# Altium PCB SRX.PcbDoc (part 1 of 2)
Units mm, origin at the board's own origin, x right, y up, seen from the top; angles counter-clockwise.
Board outline 75 x 42 mm, 4 copper layers (Outer Top Layer, Inner Top Layer, Inner Bottom Layer, Outer Bottom Layer), stack 1.564 mm thick; 114 components, 89 nets, 403 pads, 367 vias.
Unrouted connection lines stored in the file: 107.
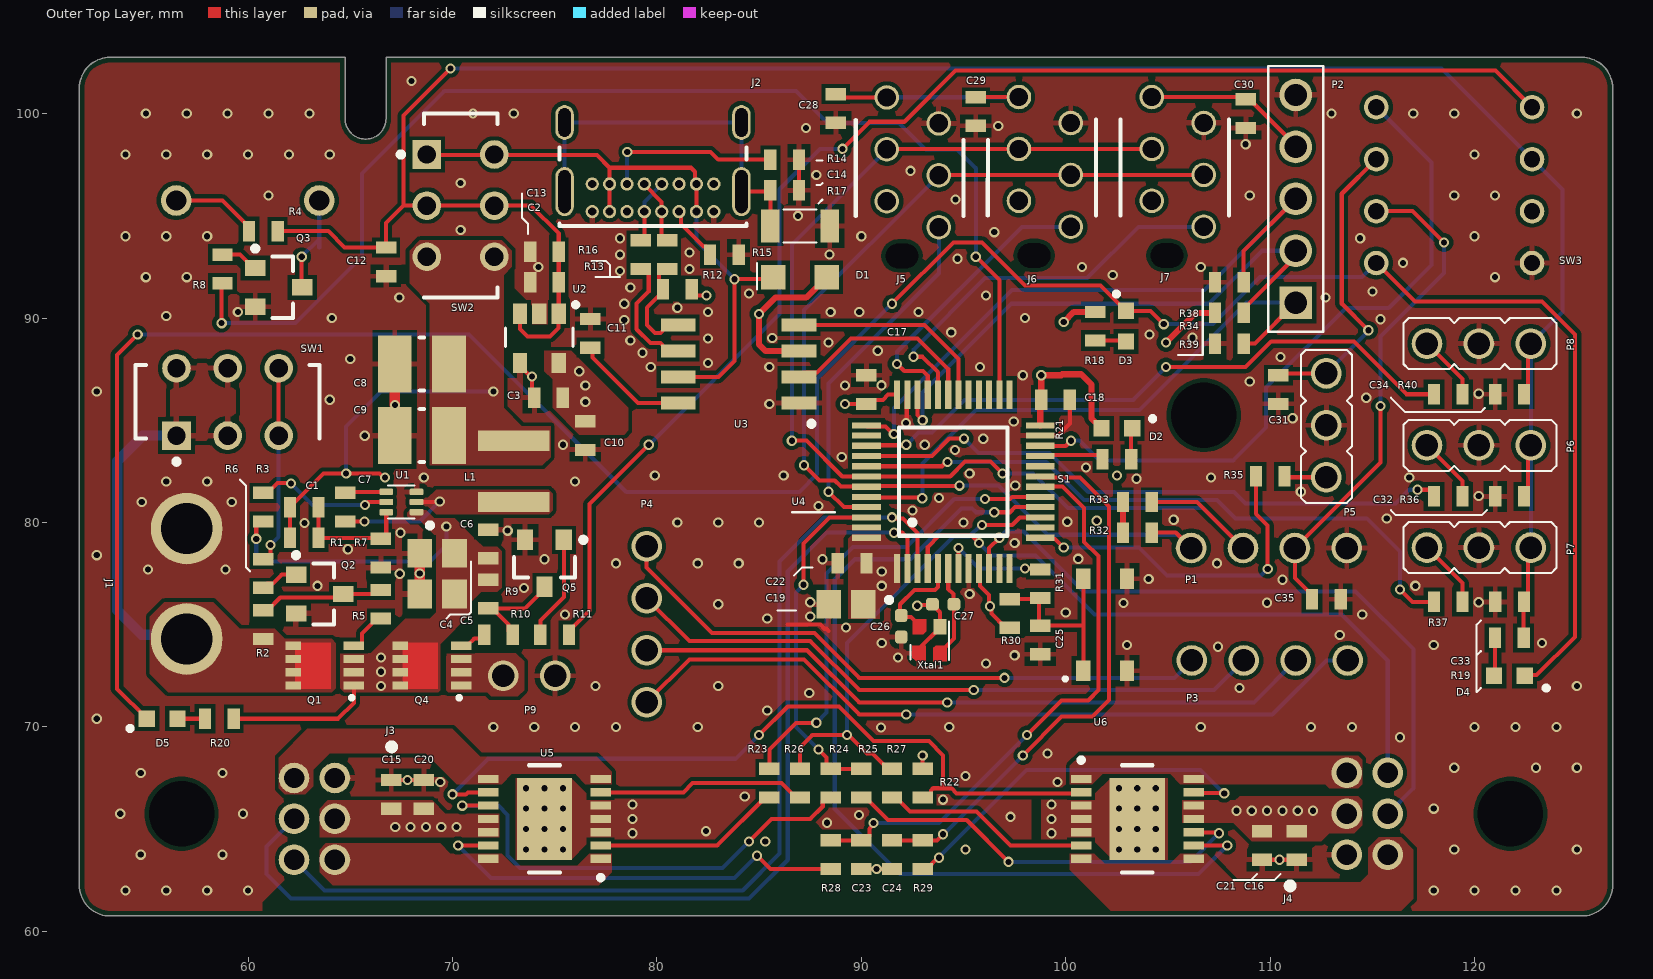
[diagram p0: Outer Top Layer view]
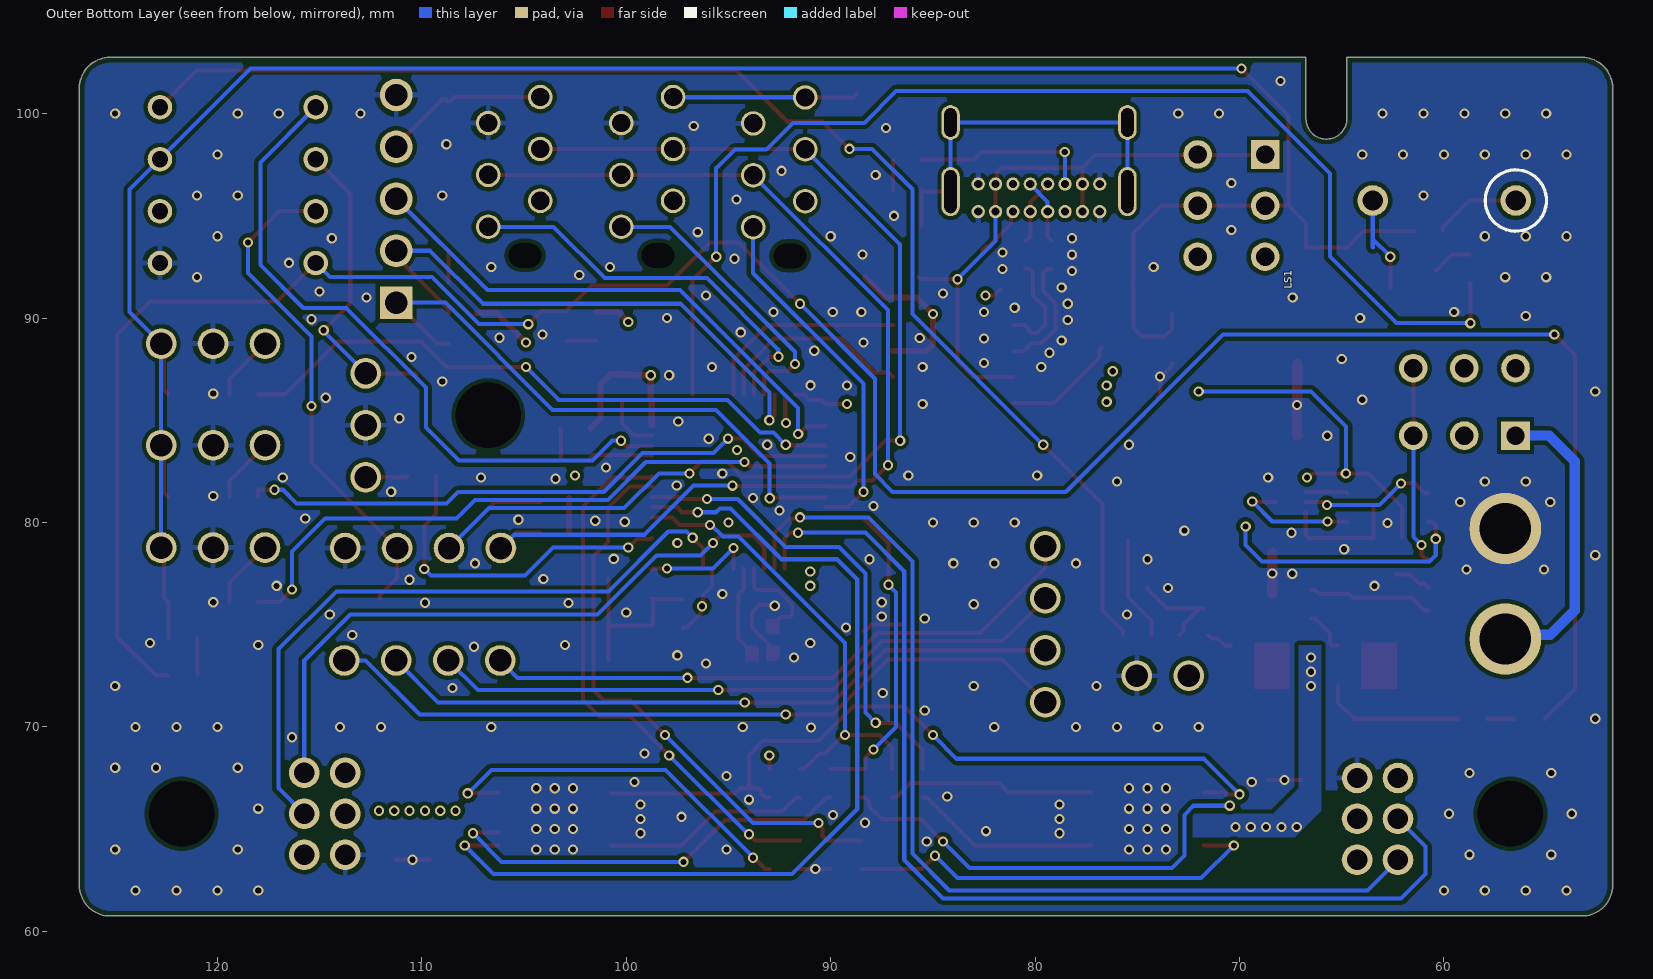
[diagram p1: Outer Bottom Layer view, seen from below]
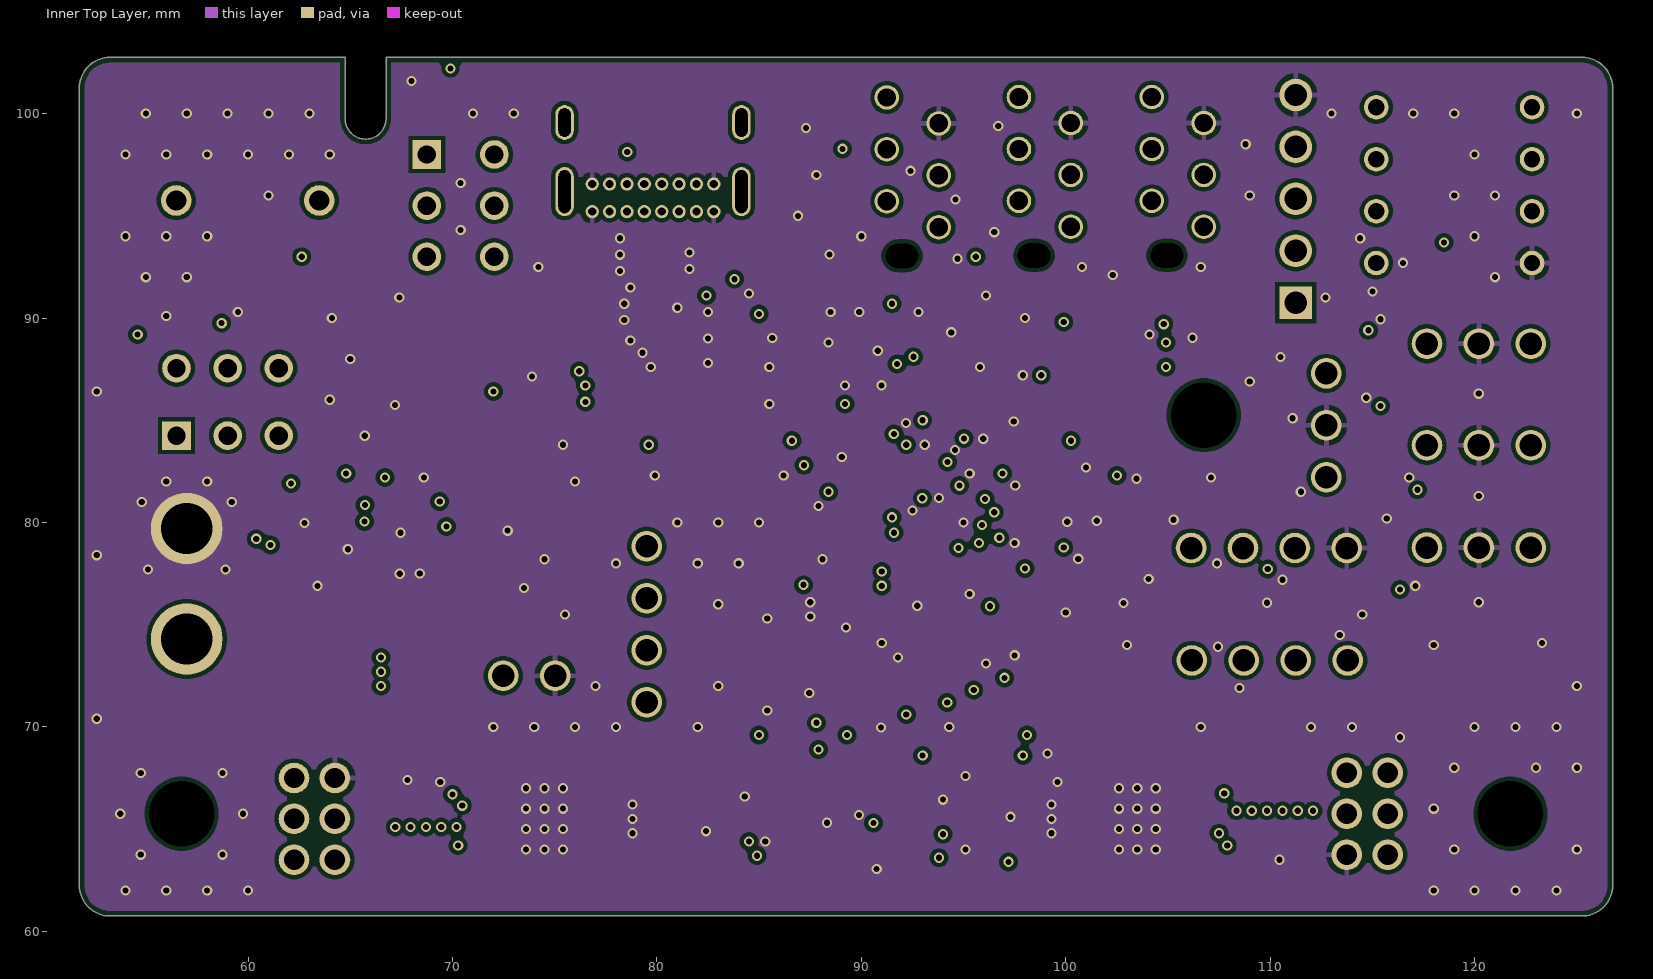
[diagram p2: Inner Top Layer]
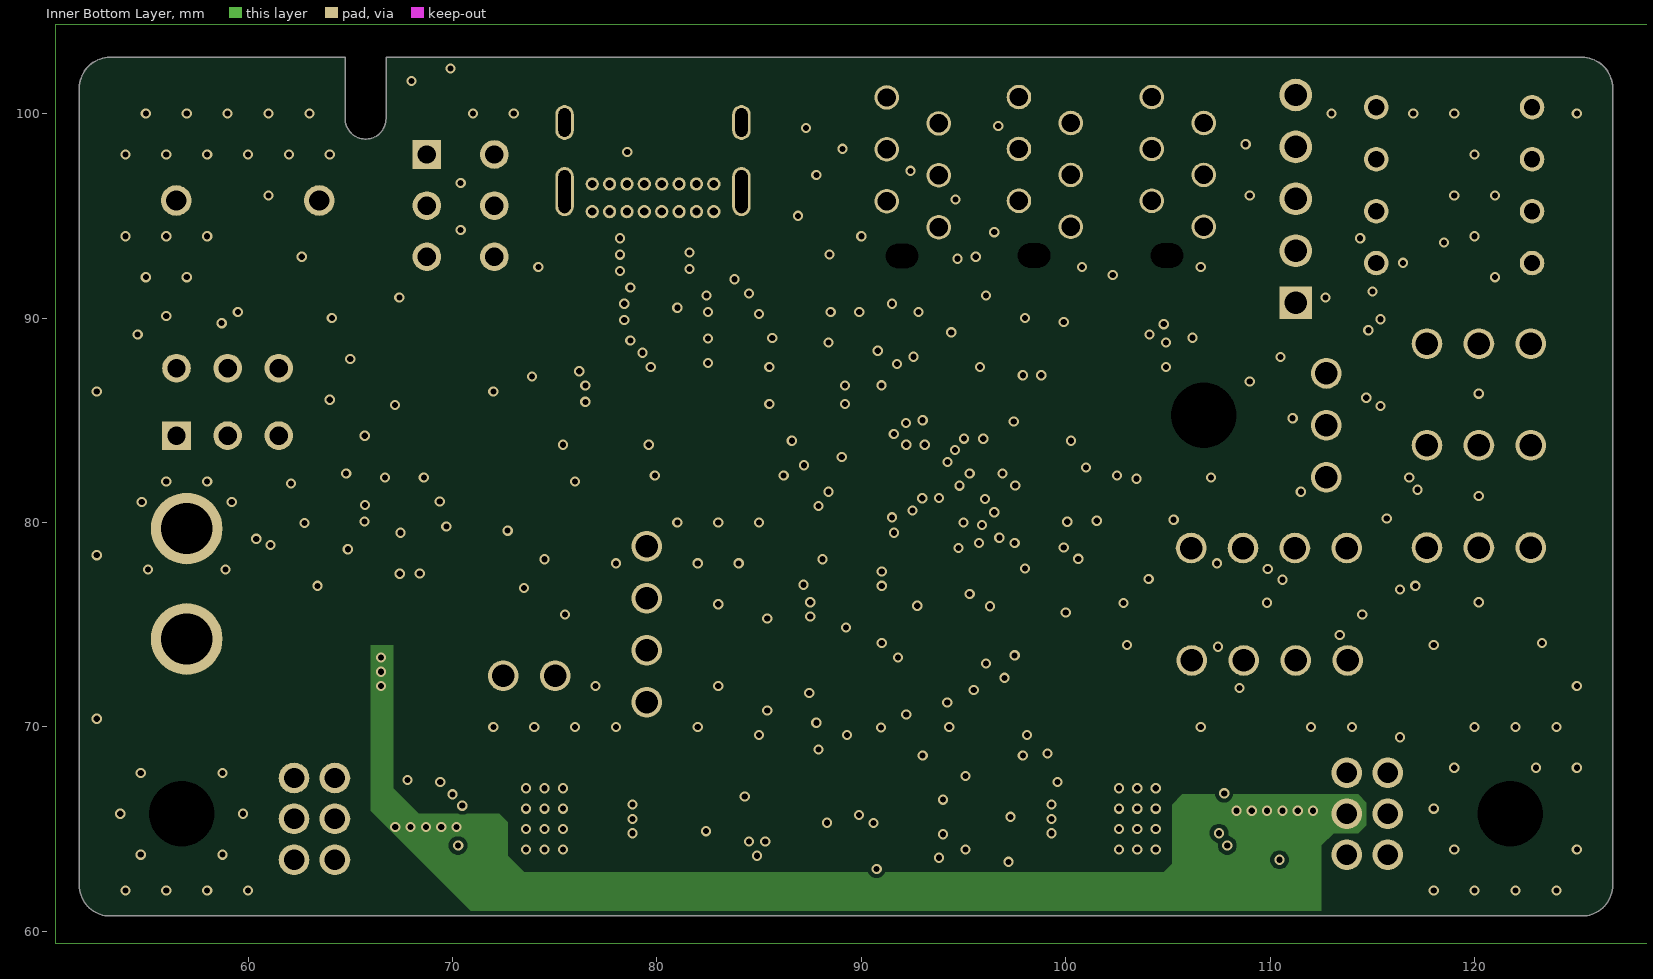
[diagram p3: Inner Bottom Layer]

## Layer stack, top to bottom
Top Solder: solder mask 0.0102, Solder Resist, Dk 3.8
Outer Top Layer: signal copper 0.035
Dielectric 2: prepreg 0.0994, PP-006, Dk 4.1
Inner Top Layer: signal copper 0.0152
Dielectric 1: dielectric 1.265, FR-4, Dk 3.6
Inner Bottom Layer: signal copper 0.0152
Dielectric 3: prepreg 0.0994, PP-006, Dk 4.1
Outer Bottom Layer: signal copper 0.035
Bottom Solder: solder mask 0.0102, Solder Resist, Dk 3.8

## Board outline
51.75,62.25 51.75,101.25 cw(c53.25,101.25) 53.25,102.75 64.75,102.75 64.75,99.75 ccw(c65.75,99.75) 66.75,99.75 66.75,102.75 125.25,102.75 cw(c125.25,101.25) 126.75,101.25 126.75,62.25 cw(c125.25,62.25) 125.25,60.75 53.25,60.75 cw(c53.25,62.25)

## Design rules (kind name [scope] priority, off if disabled: settings)
BoardOutlineClearance [All] p1: gap=0.254 ignorepadtopadclearanceinfootprint=FALSE except(0: Arc-SplitContinuation Track-SplitContinuation SMDPad-SplitContinuation THPad-SplitContinuation Via-SplitContinuation Fill-SplitContinuation Poly-SplitContinuation Region-SplitContinuation Text-SplitContinuation)
Clearance Clearance_1 [InNet('NetR101_1')] p1: gap=0.1 ignorepadtopadclearanceinfootprint=FALSE
Clearance [All] p2: gap=0.2 ignorepadtopadclearanceinfootprint=FALSE
ComponentClearance [All] p1: gap=0.254 collisioncheckmode=3 verticalgap=0.254 showdistances=FALSE donotcheckwithout3dbody=TRUE
DiffPairsRouting USB90 [All] p1: maxlimit=0.3 minlimit=0.127 mostfreqgap=0.127 toplayer_mingap=0.127 toplayer_minwidth=0.157 toplayer_maxwidth=0.3 toplayer_prefwidth=0.157 midlayer1_maxgap=0.2 midlayer1_prefgap=0.127 midlayer1_minwidth=0.115 midlayer1_maxwidth=0.3 midlayer1_prefwidth=0.115 midlayer2_maxgap=0.2 midlayer2_prefgap=0.127 midlayer2_minwidth=0.115 midlayer2_maxwidth=0.3 midlayer2_prefwidth=0.115 bottomlayer_mingap=0.127 bottomlayer_minwidth=0.157 bottomlayer_maxwidth=0.3 bottomlayer_prefwidth=0.157 impedanceprofiledriven=TRUE impedanceprofileid={0E41DA45-587D-4456-80FA-6C8BAD005A01} impedanceprofilevalue=90.000000 maxuncoupledlength=12.7
DiffPairsRouting [All] p2: maxlimit=0.254 minlimit=0.254 mostfreqgap=0.254 toplayer_minwidth=0.381 toplayer_maxwidth=0.381 toplayer_prefwidth=0.381 midlayer1_minwidth=0.381 midlayer1_maxwidth=0.381 midlayer1_prefwidth=0.381 midlayer2_minwidth=0.381 midlayer2_maxwidth=0.381 midlayer2_prefwidth=0.381 bottomlayer_minwidth=0.381 bottomlayer_maxwidth=0.381 bottomlayer_prefwidth=0.381 maxuncoupledlength=12.7
HoleSize [All] p1: absolutevalues=TRUE maxlimit=5 minlimit=0.025 maxpercent=80.000 minpercent=20.000
MinimumSolderMaskSliver [All] p1: minsoldermaskwidth=0
PlaneClearance [IsNamedPolygon('Main')] p1: clearance=1
PlaneClearance PlaneClearance_1 [All] p2: clearance=0.508
PolygonConnect PWRCon [IsPad And AsMM(HoleDiameter) > 1] p1: connectstyle=Direct reliefconductorwidth=0.254 reliefentries=4 polygonreliefangle="90 Angle" airgapwidth=0.254
PolygonConnect MainPWR [All vs IsNamedPolygon('Main') OR IsNamedPolygon('Main')] p2: connectstyle=Direct reliefconductorwidth=0.254 reliefentries=4 polygonreliefangle="90 Angle" airgapwidth=0.254
PolygonConnect [All] p3: thpad.connectstyle=Relief thpad.reliefconductorwidth=0.254 thpad.reliefentries=4 thpad.polygonreliefangle="90 Angle" thpad.airgapwidth=0.254 smdpad.connectstyle=Relief smdpad.reliefconductorwidth=0.254 smdpad.reliefentries=4 smdpad.polygonreliefangle="90 Angle" smdpad.airgapwidth=0.254 via.connectstyle=Direct via.reliefconductorwidth=0.254 via.reliefentries=4 via.polygonreliefangle="90 Angle" via.airgapwidth=0.254
RoutingVias [All] p1: holewidth=0.4 width=0.7 viastyle="Through Hole" minholewidth=0.3 minwidth=0.5 maxholewidth=0.7 maxwidth=1
SilkToSilkClearance [All] p1: silktosilkclearance=0.15
SilkToSolderMaskClearance [IsPad] p1: minsilkscreentomaskgap=0.1 clearancetoexposedcopper=TRUE
SolderMaskExpansion IsVia [IsVia] p1: expansion=0 istentingtop=FALSE soldermaskfromhole=TRUE
SolderMaskExpansion SolderMaskExpansion_1 [All] p2: expansion=0.102 istentingtop=FALSE
SupplyNets "Schematic Supply Nets_13" [InNet('RF_5V')] p1: voltage=0.000
SupplyNets "Schematic Supply Nets_12" [InNet('BAT_SW')] p2: voltage=0.000
SupplyNets "Schematic Supply Nets_11" [InNet('LIGHTS_PWR')] p3: voltage=0.000
SupplyNets "Schematic Supply Nets_10" [InNet('OLED_3V3')] p4: voltage=0.000
SupplyNets "Schematic Supply Nets_9" [InNet('SW_5V')] p5: voltage=0.000
SupplyNets "Schematic Supply Nets_8" [InNet('USB_5V')] p6: voltage=0.000
SupplyNets "Schematic Supply Nets_7" [InNet('BAT+')] p7: voltage=0.000
SupplyNets "Schematic Supply Nets_4" [InNet('LED_GND')] p8: voltage=0.000
SupplyNets "Schematic Supply Nets_3" [InNet('+3V3')] p9: voltage=0.000
SupplyNets "Schematic Supply Nets_2" [InNet('+5V')] p10: voltage=0.000
SupplyNets "Schematic Supply Nets_1" [InNet('+12V')] p11: voltage=0.000
SupplyNets "Schematic Supply Nets" [InNet('GND')] p12: voltage=0.000
Width Antenna [InNetClass('RF_ANT')] p1: maxlimit=0.3 minlimit=0.144 preferedwidth=0.2 toplayer_minwidth=0.2 midlayer1_maxwidth=0.2 midlayer1_prefwidth=0.144 midlayer2_maxwidth=0.2 midlayer2_prefwidth=0.144 bottomlayer_minwidth=0.2 impedanceprofiledriven=TRUE minimp=50.000000 maximp=50.000000 favimp=50.000000
Width Width_1 [All] p2: maxlimit=3 minlimit=0.2 preferedwidth=0.3 minimp=50.000000 maximp=50.000000 favimp=50.000000
23 further rules are at their usual default settings.

## Classes and differential pairs
differential pair USB_D: +USB_D_P -USB_D_N
differential pair D: +D_P -D_N

## Components (designator, comment, footprint, x,y, rotation, side; value= is the part's Value field where it differs from the comment)
C1 "47p" MLCC_0603_M 62.75,80.75 r180 top value=47pF
C2 "1u" MLCC_0603_M 74.5,91.75 r0 top value=1µF
C3 "1u" MLCC_0603_M 74.7,86.1 r0 top value=1µF
C4 "10u" MLCC_0805_M 69.25,76.5 r0 top value=10µF
C5 "10u" MLCC_0805_M 69.25,78.5 r0 top value=10µF
C6 "100n" MLCC_0603_M 71.75,78.95 r270 top value=100nF
C7 "100n" MLCC_0603_M 64.75,80.75 r270 top value=100nF
C8 "C1210C226K4PAC-TU" 1210_MLCC 68.5,87.75 r0 top value=22µF
C9 "C1210C226K4PAC-TU" 1210_MLCC 68.5,84.25 r0 top value=22µF
C10 "100n" MLCC_0603_M 76.5,84.25 r270 top value=100nF
C11 "1u" MLCC_0603_M 76.75,89.25 r90 top value=1µF
C12 "1u" MLCC_0603_M 66.75,92.75 r90 top value=1µF
C13 "100n" MLCC_0603_M 74.5,93.25 r180 top value=100nF
C14 "1n" MLCC_0603_M 86.25,96.25 r180 top value=1nF
C15 "4.7u" MLCC_0603_M 67,66.7 r270 top value=4,7µF
C16 "4.7u" MLCC_0603_M 111.3,64.2 r90 top value=4,7µF
C17 "100n" MLCC_0603_M 90.25,86.5 r90 top value=100nF
C18 "100n" MLCC_0603_M 99.5,86 r0 top value=100nF
C19 "4.7u" MLCC_0805_M 89.25,76 r0 top value=4.7µF
C20 "100n" MLCC_0603_M 68.6,66.7 r270 top value=100nF
C21 "100n" MLCC_0603_M 109.6,64.2 r90 top value=100nF
C22 "100n" MLCC_0603_M 89.55,78 r180 top value=100nF
C23 "15p" MLCC_0603_M 90,63.75 r270 top value=15pF
C24 "15p" MLCC_0603_M 91.5,63.75 r270 top value=15pF
C25 "100n" MLCC_0603_M 98.75,74.25 r90 top value=100nF
C26 "15p" MLCC_0402_M 91.95,74.925 r90 top value=15pF
C27 "15p" MLCC_0402_M 94,76 r0 top value=15pF
C28 "100n" MLCC_0603_M 88.75,100.25 r270 top value=100nF
C29 "100n" MLCC_0603_M 95.6,100.1 r270 top value=100nF
C30 "100n" MLCC_0603_M 108.8,100 r270 top value=100nF
C31 "100n" MLCC_0603_M 110.4,86.5 r270 top value=100nF
C32 "100n" MLCC_0603_M 121.71,81.273 r180 top value=100nF
C33 "100n" MLCC_0603_M 121.71,76.113 r180 top value=100nF
C34 "100n" MLCC_0603_M 121.71,86.273 r180 top value=100nF
C35 "100n" MLCC_0603_M 112.75,76.25 r0 top value=100nF
D1 "1N5817G" "SOD-323 based on 1N5817WS" 87,92 r0 top
D2 "Red" "0603 RED LED" 102.5,84.6 r0 top
D3 "Red" "0603 RED LED" 102.95,89.6 r90 top
D4 "Red" "0603 RED LED" 121.7,72.5 r0 top
D5 "Red" "0603 RED LED" 55.8,70.4 r180 top
J1 "XT30U-F" XT30U-F 57,77 r180 top
J2 "USB4085-GF-A" FP-USB4085-GF-A-MFG 79.81,99.23 r180 top
J3 "0878310641" 0878310641 63.25,65.5 r270 top
J4 "0878310641" 0878310641 114.75,65.75 r90 top
J5 "7-215079-6" 7-215079-6-Footprint-1 91.25,100.79 r270 top
J6 "7-215079-6" 7-215079-6-Footprint-1 97.71,100.81 r270 top
J7 "7-215079-6" 7-215079-6-Footprint-1 104.21,100.81 r270 top
L1 "74479335329247" WE-PMFI_353220 73,82.5 r90 top value=4.7µH
LS1 "Buzzer" Buzzer-Footprint-1 59.985,95.75 r90 bottom
P1 "PH1-04-UA" "4Pos Pin Header Vertical" 109.94,78.75 r180 top
P2 "61300511121" 61300511121 111.25,95.83 r90 top
P3 "LiPo Alarm" "4Pos Pin Header Vertical" 109.98,73.25 r180 top
P4 "Battery Header" "4Pos Pin Header Vertical" 79.5,75.02 r90 top
P5 "M20-9990345" "3Pos Pin Header" 112.75,84.77 r90 top
P6 "M20-9990345" "3Pos Pin Header" 120.19,83.773 r180 top
P7 "M20-9990345" "3Pos Pin Header" 120.19,78.773 r180 top
P8 "M20-9990345" "3Pos Pin Header" 120.19,88.75 r180 top
P9 "PH1-02-UA" "2Pos Pin Header Vertical" 73.75,72.5 r0 top
Q1 "SIS427EDN-T1-GE3" "Copy of TPN2R304PL,L1Q-Footprint-1" 63.75,73 r90 top
Q2 "BC848B,235" SOT-23-3 63.5,76.5 r0 top
Q3 "BC848B,235" SOT-23-3 61.5,91.5 r0 top
Q4 "SIS427EDN-T1-GE3" "Copy of TPN2R304PL,L1Q-Footprint-1" 69,73 r90 top
Q5 "BC848B,235" SOT-23-3 74.5,78 r270 top
R1 "52k" Resistor_0603_M 62.75,79.25 r180 top value=53.6k
R2 "100k" Resistor_0603_M 60.75,75 r270 top
R3 "10k" Resistor_0603_M 60.75,80.75 r90 top
R4 "100R" Resistor_0603_M 60.75,94.25 r180 top value=100
R5 "100R" Resistor_0603_M 66.5,76 r90 top value=100
R6 "100k" Resistor_0603_M 60.75,77.5 r90 top
R7 "10k" Resistor_0603_M 66.5,78.5 r90 top
R8 "100R" Resistor_0603_M 58.75,92.4 r90 top value=100
R9 "100k" Resistor_0603_M 71.75,76.5 r90 top
R10 "100R" Resistor_0603_M 72.25,74.5 r0 top value=100
R11 "4.7k" Resistor_0603_M 75,74.5 r0 top value=4,7k
R12 "1.5k" Resistor_0603_M 81,91.4 r0 top value=1,5k
R13 "22R" Resistor_0603_M 80.5,93.1 r270 top value=22
R14 "5.1k" Resistor_0603_M 86.25,97.75 r180 top value=5,1k
R15 "5.1k" Resistor_0603_M 83.3,93.1 r0 top value=5,1k
R16 "22R" Resistor_0603_M 79.2,93.1 r270 top value=22
R17 "1M" Resistor_1206_M 87,94.5 r0 top
R18 "68R" Resistor_0603_M 101.45,89.6 r90 top value=100
R19 "150R" Resistor_0603_M 121.7,74.35 r180 top value=200
R20 "470R" Resistor_0603_M 58.6,70.4 r0 top value=680
R21 "68R" Resistor_0603_M 102.5,83.1 r180 top value=200
R22 "2k" Resistor_0603_M 93,67.25 r90 top
R23 "22R" Resistor_0603_M 85.5,67.25 r270 top value=22
R24 "22R" Resistor_0603_M 88.5,67.25 r270 top value=22
R25 "22R" Resistor_0603_M 90,67.25 r270 top value=22
R26 "22R" Resistor_0603_M 87,67.25 r270 top value=22
R27 "22R" Resistor_0603_M 91.5,67.25 r270 top value=22
R28 "22R" Resistor_0603_M 88.5,63.75 r270 top value=22
R29 "22R" Resistor_0603_M 93,63.75 r270 top value=22
R30 "10k" Resistor_0603_M 97.25,75.55 r270 top
R31 "100R" Resistor_0603_M 98.75,77 r90 top value=100
R32 "4.7k" Resistor_0603_M 103.5,79.5 r180 top value=4,7k
R33 "4.7k" Resistor_0603_M 103.5,81 r180 top value=4,7k
R34 "10k" Resistor_0603_M 108,90.25 r0 top
R35 "100R" Resistor_0603_M 110,82.25 r0 top value=100
R36 "100R" Resistor_0603_M 118.71,81.273 r180 top value=100
R37 "100R" Resistor_0603_M 118.71,76.113 r180 top value=100
R38 "10k" Resistor_0603_M 108,91.75 r0 top
R39 "10k" Resistor_0603_M 108,88.75 r0 top
R40 "100R" Resistor_0603_M 118.71,86.273 r180 top value=100
S1 "PTS815S" "PTS815 SJM 250 SMTR LFS" 101.975,75 r90 top
SW1 "JS202011CQN" FP-JS202011CQN-MFG 59,85.9 r0 top
SW2 "JS202011CQN" FP-JS202011CQN-MFG 70.4,95.5 r270 top
SW3 "DS04-254-2L-04BK" DS04-254-2L-04BK-Footprint-1 119,96.5 r0 top
U1 "TPS562207DRLR" FP-DRL0006A-MFG 67.5,81 r180 top
U2 "NCP115ASN330T2G" TSOP-5 74.25,89 r270 top
U3 "HT42B534-2" "SOP-8 150mil" 84,87.75 r180 top
U4 "STM32F103C8T6" STM-LQFP48_M 94.5,82 r90 top
U5 "BTM9011EPXUMA1" BTM9011EPXUMA1 74.5,65.5 r180 top
U6 "BTM9011EPXUMA1" BTM9011EPXUMA1 103.5,65.5 r0 top
Xtal1 "ABM11-16.000MHZ-12-N1G-T" FP-ABM11-MFG 93.35,74.25 r270 top

## Footprints (in the part's own frame and the unit in brackets; to place one, negate y for a bottom-side part, rotate by r counter-clockwise, add the part's x,y. Pads: shape width x height; smd on the part's side, far side on the other; paste and mask are expansions set on the pad)
"2Pos Pin Header Vertical" [mm]
  round 1.5 hole 1.1: 1(-1.27,0) 2(1.27,0)
  body extent -2.55,-1.25 2.54,1.25, height 7.25
"3Pos Pin Header" [mm]
  round 1.5 hole 1.1: 1(-2.56,0) 2(-0.02,0) 3(2.52,0)
  silkscreen extent -3.81,-1.25 3.67,1.25, body extent -3.89,-1.24 3.73,1.25, height 8.57
"4Pos Pin Header Vertical" [mm]
  round 1.5 hole 1.1: 1(-3.81,0) 2(-1.27,0) 3(1.27,0) 4(3.81,0)
  body extent -5.08,-1.27 5.08,1.27, height 8.57
7-215079-6-Footprint-1 [mm]
  round 0 hole 1.2 slot 1.6 at 90 deg unplated: 0(7.75,0.74)
  round 1.2 hole 0.9: 1(0,0) 2(1.27,2.54) 3(2.54,0) 4(3.81,2.54) 5(5.08,0) 6(6.35,2.54)
  silkscreen extent 1.1,-1.53 5.8,3.75, body extent -1.6,-1.38 7.96,3.62, height 4
"0603 RED LED" [mm] "Generic 0603 RED LED"
  rect 0.8x0.8 smd: 1(0.75,0) 2(-0.75,0)
  silkscreen extent 1.73,0.45 1.77,0.5, body extent -0.8,-0.4 0.8,0.4, height 0.4
1210_MLCC [mm] "Chip Capacitor, 2-Leads, Body 3,20x2,50mm, IPC Medium Density"
  rect 1.65x2.8 smd: 1(-1.325,0) 2(1.325,0)
  silkscreen extent -0.1,-1.3 0.1,1.3, body extent -1.8,-1.4 1.8,1.4, height 2.8
0878310641 [mm]
  round 1.5 hole 1: 1(-2,1) 2(0,1) 3(2,1) 4(-2,-1) 5(0,-1) 6(2,-1)
  silkscreen extent -3.67,3.63 -3.38,3.92, body extent -4.31,-3.14 4.34,3.16, height 6.4
61300511121 [mm] "Pin Header, pitch 2.54 mm, THT, Vertical, single row, 5p"
  rect 1.6x1.6 hole 1.1: 1(-5.08,0)
  round 1.6 hole 1.1: 2(-2.54,0) 3(0,0) 4(2.54,0) 5(5.08,0)
  silkscreen extent -6.5,-1.35 6.5,1.35, body extent -6.35,-1.27 6.35,1.27, height 8.57
BTM9011EPXUMA1 [mm]
  rect 1x0.4 smd: 1(-2.75,1.95) 2(-2.75,1.3) 3(-2.75,0.65) 4(-2.75,0) 5(-2.75,-0.65) 6(-2.75,-1.3) 7(-2.75,-1.95) 8(2.75,-1.95) 9(2.75,-1.3) 10(2.75,-0.65) 11(2.75,0) 12(2.75,0.65) 13(2.75,1.3) 14(2.75,1.95)
  rect 2.7x4 smd: 15(0,0)
  silkscreen extent -2.85,-2.62 0.75,2.98, body extent -3,-2.45 3,2.45, height 1.16
Buzzer-Footprint-1 [mm]
  round 1.5 hole 1: 1(0,-3.5) 2(0,3.5)
  silkscreen extent -1.5,-5 1.5,-2, body extent -5.93,-5.99 6.06,6, height 9
"Copy of TPN2R304PL,L1Q-Footprint-1" [mm]
  rect 0.405x0.99 smd: 1(-0.975,-1.425) 2(-0.325,-1.425) 3(0.325,-1.425) 4(0.975,-1.425)
  rect 0.405x0.76 smd: 5(-0.975,1.545) 6(-0.325,1.545) 7(0.325,1.545) 8(0.975,1.545)
  Outer Top Layer region: 1.125,-0.288 1.125,1.437 -1.125,1.437 -1.125,-0.288
  silkscreen extent -1.63,-1.38 -1.52,-1.27, body extent -1.65,-1.65 1.65,1.65, height 1.12
DS04-254-2L-04BK-Footprint-1 [mm]
  round 1.2 hole 0.8: 1(-3.81,3.81) 2(-3.81,1.27) 3(-3.81,-1.27) 4(-3.81,-3.81) 5(3.81,-3.81) 6(3.81,-1.27) 7(3.81,1.27) 8(3.81,3.81)
  body extent -4.06,-5.58 3.81,5.58, height 3.09
FP-ABM11-MFG [mm]
  round 0.025 smd paste+0 mask+0: 1(-0.65,-0.5) 2(0.65,-0.525) 3(0.65,0.5)
  rect 0.75x0.65 smd paste+0 mask+0: 4(-0.65,0.5)
  Outer Top Layer region: 1.025,-0.699 0.871,-0.85 0.275,-0.85 0.275,-0.2 1.025,-0.2 1.025,-0.2
  Outer Top Layer region: 0.38,0.175 0.271,0.283 0.272,0.333 0.272,0.825 1.028,0.825 1.028,0.175
  Outer Top Layer region: -0.275,-0.314 -0.419,-0.175 -1.025,-0.175 -1.025,-0.825 -0.275,-0.825 -0.275,-0.825
  body extent -1.17,-0.97 1.17,0.97, height 0.25
FP-DRL0006A-MFG [mm]
  rrect33% 0.67x0.3 smd paste+0 mask+0: 1(-0.74,0.5) 2(-0.74,0) 3(-0.74,-0.5) 4(0.74,-0.5) 5(0.74,0) 6(0.74,0.5)
  silkscreen extent -1.52,-0.8 0.65,1.27, body extent -1.17,-1.1 1.17,1.1, height 0.25
FP-JS202011CQN-MFG [mm]
  rect 1.4x1.4 hole 0.9 paste-2539.97 mask+0: 1(-2.5,-1.65)
  round 1.4 hole 0.9 paste-2539.97 mask+0: 2(0,-1.65) 3(2.5,-1.65) 4(2.5,1.65) 5(0,1.65) 6(-2.5,1.65)
  silkscreen extent -4.5,-3.05 4.5,1.8, body extent -4.6,-2.45 4.6,2.45, height 0.25
FP-USB4085-GF-A-MFG [mm]
  rrect100% 0.9x2.4 hole 2.1 slot 0.6 at 0 deg paste-2539.97 mask+0: 1(-4.325,3.045) 2(4.325,3.045)
  rrect100% 0.9x1.7 hole 1.4 slot 0.6 at 0 deg paste-2539.97 mask+0: 3(-4.325,-0.335) 4(4.325,-0.335)
  round 0.65 hole 0.4 paste-2539.97 mask+0: A1(-2.975,4.025) A4(-2.125,4.025) A5(-1.275,4.025) A6(-0.425,4.025) A7(0.425,4.025) A8(1.275,4.025) A9(2.125,4.025) A12(2.975,4.025) B1(2.975,2.675) B4(2.125,2.675) B5(1.275,2.675) B6(0.425,2.675) B7(-0.425,2.675) B8(-1.275,2.675) B9(-2.125,2.675) B12(-2.975,2.675)
  silkscreen extent -4.57,0.89 4.57,4.73, body extent -4.87,-4.83 4.87,4.83, height 0.25
MLCC_0402_M [mm]
  rrect49% 0.63x0.61 smd: 1(-0.525,0) 2(0.525,0)
  body extent -0.5,-0.25 0.5,0.25, height 0.55
MLCC_0603_M [mm]
  rect 0.6x1 smd: 1(-0.7,0) 2(0.7,0)
  body extent -0.8,-0.4 0.8,0.4, height 0.92
MLCC_0805_M [mm] "Chip Capacitor, 2-Leads, Body 2,00x1,25mm, IPC Medium Density"
  rect 1.2x1.4 smd: 1(-0.85,0) 2(0.85,0)
  body extent -1.05,-0.67 1.05,0.67, height 1.35
"PTS815 SJM 250 SMTR LFS" [mm] "Tactile Switch SPST-NO Top Actuated Surface Mount"
  rect 1x0.7 smd: 1(-2.25,1.125) 2(2.25,1.125) 3(-2.25,-1.025) 4(2.25,-1.025)
  silkscreen extent -2.72,1.92 -2.58,2.07, body extent -2.25,-1.55 2.25,1.65, height 2.5
Resistor_0603_M [mm]
  rect 0.6x1 smd: 1(-0.7,0) 2(0.7,0)
  body extent -0.8,-0.4 0.8,0.4, height 0.45
Resistor_1206_M [mm]
  rect 0.9x1.6 smd: 1(-1.45,0) 2(1.45,0)
  silkscreen extent -0.8,-0.8 0.8,0.8, body extent -1.6,-0.83 1.6,0.83, height 0.56
"SOD-323 based on 1N5817WS" [mm] "SOD-323 based on 1N5817WS"
  rect 1.2x1.2 smd: 1(-1.3,0) 2(1.3,0)
  silkscreen extent -2.1,-0.6 -2.1,0.7, body extent -1.3,-0.67 1.3,0.68, height 1.1
"SOP-8 150mil" [mm]
  rect 1.7x0.65 smd: 1(-2.95,1.905) 2(-2.95,0.635) 3(-2.95,-0.635) 4(-2.95,-1.905) 5(2.95,-1.905) 6(2.95,-0.635) 7(2.95,0.635) 8(2.95,1.905)
  silkscreen extent -3.68,2.8 -3.43,3.05, body extent -3.1,-2.5 3.1,2.5, height 1.83
SOT-23-3 [mm] "SOT23, 3-Leads, Body 2,92x2,37mm, Pitch 0,95mm, IPC Medium Density"
  rect 1x0.8 smd: 1(-1.15,0.95) 2(-1.15,-0.95) 3(1.15,0)
  silkscreen extent -1.27,-1.5 0.7,2.02, body extent -1.32,-1.52 1.32,1.52, height 1.11
STM-LQFP48_M [mm] "QFP, 48-Leads, Body 7x7mm, Pitch 0.5mm, IPC Low Density"
  rect 1.4x0.3 smd: 1(-4.25,2.75) 2(-4.25,2.25) 3(-4.25,1.75) 4(-4.25,1.25) 5(-4.25,0.75) 6(-4.25,0.25) 7(-4.25,-0.25) 8(-4.25,-0.75) 9(-4.25,-1.25) 10(-4.25,-1.75) 11(-4.25,-2.25) 12(-4.25,-2.75) 25(4.25,-2.75) 26(4.25,-2.25) 27(4.25,-1.75) 28(4.25,-1.25) 29(4.25,-0.75) 30(4.25,-0.25) 31(4.25,0.25) 32(4.25,0.75) 33(4.25,1.25) 34(4.25,1.75) 35(4.25,2.25) 36(4.25,2.75)
  rect 0.3x1.4 smd: 13(-2.75,-4.25) 14(-2.25,-4.25) 15(-1.75,-4.25) 16(-1.25,-4.25) 17(-0.75,-4.25) 18(-0.25,-4.25) 19(0.25,-4.25) 20(0.75,-4.25) 21(1.25,-4.25) 22(1.75,-4.25) 23(2.25,-4.25) 24(2.75,-4.25) 37(2.75,4.25) 38(2.25,4.25) 39(1.75,4.25) 40(1.25,4.25) 41(0.75,4.25) 42(0.25,4.25) 43(-0.25,4.25) 44(-0.75,4.25) 45(-1.25,4.25) 46(-1.75,4.25) 47(-2.25,4.25) 48(-2.75,4.25)
  silkscreen extent -5.91,-2.65 2.65,3.27, body extent -3.5,-3.5 3.5,3.5, height 1.6
TSOP-5 [mm] "SOT-23-5, 5-Leads, Body 3.0x1.5mm, Pitch 0.95mm, IPC High Density"
  rect 1x0.7 smd: 1(-1.2,0.95) 2(-1.2,0) 3(-1.2,-0.95) 4(1.2,-0.95) 5(1.2,0.95)
  silkscreen extent -1.75,-1.65 0.38,1.88, body extent -1.38,-1.47 1.37,1.53, height 1.1
WE-PMFI_353220 [mm] "SMT Power Inductor, body 3.50 x 3.20 mm"
  rect 1x3.5 smd: 1(-1.5,0) 2(1.5,0)
  body extent -1.75,-1.6 1.75,1.6, height 2
XT30U-F [mm]
  round 3.5 hole 2.5: 1(0,2.7) 2(0,-2.7)
  body extent -2.8,-5.44 2.82,5.43, height 9.67

## Part data
C1: library part CMP-001-0765-1, "MLCC, 0603, 47p, 10%, 50V, X7R", Capacitor Type=Ceramic, Case/Package=0603, Dielectric=X7R, Manufacturer=Any, Tolerance=10%, Voltage=50V, Mount=SMD, Part number="MLCC, 0603, 47p, 10%, 50V, X7R", RoHS=Yes
C2 C3 C11 C12: library part CMP-001-0565-1, "MLCC, 0603, 1u, 10%, 50V, X5R", Capacitor Type=Ceramic, Case/Package=0603, Dielectric=X5R, Manufacturer=Any, Tolerance=10%, Voltage=50V, Mount=SMD, Part number="MLCC, 0603, 1u, 10%, 50V, X5R", RoHS=Yes
C4 C5: library part CMP-001-0829-2, "MLCC, 0805, 10u, 10%, 50V, X5R", Capacitor Type=Ceramic, Case/Package=0805, Dielectric=X5R, Manufacturer=Any, Tolerance=10%, Voltage=50V, Mount=SMD, Part number="MLCC, 0805, 10u, 10%, 50V, X5R", RoHS=Yes
C6 C7 C10 C13 C17 C18 C22 C25 C28 C29 C30 C31 C32 C33 C34 C35: library part CMP-001-0815-1, "MLCC, 0603, 100n, 10%, 50V, X7R", Capacitor Type=Ceramic, Case/Package=0603, Dielectric=X7R, Manufacturer=Any, Tolerance=10%, Voltage=50V, Mount=SMD, Part number="MLCC, 0603, 100n, 10%, 50V, X7R", RoHS=Yes
C8 C9: library part CMP-001-1351-1, "Capacitor;  Ceramic;  22uF;  Tol+10%;  SMT HighCapacitance;  16V;  X5R;  TR", Capacitance=22uF, Capacitor Type=Ceramic, Case Code (Imperial)=1210, Case Code (Metric)=3225, Dielectric=X5R, Manufacturer=Any, Max Operating Temperature=85°C, Min Operating Temperature=-55°C, Package Quantity=2000, Tolerance=10%, Voltage=16V, Case/Package=1210, Depth=2.5mm, Dielectric Material=Ceramic, Height=1.85mm, Length=3.2mm, Mount="Surface Mount,PCB", Number of Pins=2, Packaging="Tape and Reel", Part number=Any, Radiation Hardening=No, REACH SVHC="No SVHC", RoHS=Yes, Termination=SMD/SMT, Thickness=0.11inch, Voltage Rating=16V, Voltage Rating (DC)=16V, Width=2.5mm
C14: library part CMP-001-0547-1, "MLCC, 0603, 1n, 10%, 50V, X5R", Capacitor Type=Ceramic, Case/Package=0603, Dielectric=X5R, Manufacturer=Any, Tolerance=10%, Voltage=50V, Mount=SMD, Part number="MLCC, 0603, 1n, 10%, 50V, X5R", RoHS=Yes
C15 C16: library part CMP-001-1257-1, "MLCC, 0603, 4.7u, 10%, 35V, X5R", Capacitor Type=Ceramic, Case/Package=0603, Dielectric=X5R, Manufacturer=Any, Tolerance=10%, Voltage=35V, Mount=SMD, Part number="MLCC, 0603, 4.7u, 10%, 35V, X5R", RoHS=Yes
C19: library part CMP-001-1830-1, "MLCC, 0805, 4.7u, 20%, 50V, X5R", Capacitor Type=Ceramic, Case/Package=0805, Dielectric=X5R, Manufacturer=Any, Tolerance=20%, Voltage=50V, Mount=SMD, Part number="MLCC, 0805, 4.7u, 20%, 50V, X5R", RoHS=Yes
C20 C21: library part CMP-001-0755-1, "MLCC, 0603, 100n, 10%, 35V, X7R", Capacitor Type=Ceramic, Case/Package=0603, Dielectric=X7R, Manufacturer=Any, Tolerance=10%, Voltage=35V, Mount=SMD, Part number="MLCC, 0603, 100n, 10%, 35V, X7R", RoHS=Yes
C23 C24: library part CMP-001-0474-1, "MLCC, 0603, 15p, 5%, 50V, C0G/NP0", Capacitor Type=Ceramic, Case/Package=0603, Dielectric=C0G/NP0, Manufacturer=Any, Tolerance=5%, Voltage=50V, Mount=SMD, Part number="MLCC, 0603, 15p, 5%, 50V, C0G/NP0", RoHS=Yes
C26 C27: library part CMP-001-1853-1, "MLCC, 0402, 15p, 10%, 25V, C0G/NP0", Capacitance=15pF, Capacitor Type=Ceramic, Case Code (Imperial)=0402, Case Code (Metric)=1005, Dielectric=C0G, Manufacturer=Any, Max Operating Temperature=125°C, Min Operating Temperature=-55°C, Package Quantity=1, Temperature Coefficient=300ppm/°C, Tolerance=10%, Voltage=25V, Voltage Rating=25, Case/Package=0402, Contact Plating=Tin, Depth=0.5mm, Height=0.5mm, Length=1mm, Material=Ceramic, Mount="Surface Mount", Packaging="Tape and Reel", Part number="MLCC, 0402, 15p, 10%, 25V, C0G/NP0", Radiation Hardening=No, RoHS=Yes, Thickness=0.022inch, Width=0.02inch
D1: library part CMP-ROOT-01323-1, "Rectifier Diode, Schottky, 1 Phase, 1 Element, 1A, 20V V(RRM), Silicon, DO-204AL", Average Rectified Current=1A, Breakdown Voltage=20V, Case/Package=Axial, Forward Voltage=320mV, Manufacturer="TWGMC / onsemi", Manufacturer Lifecycle Status=ACTIVE, Max Forward Surge Current (Ifsm)=25A, Max Operating Temperature=125°C, Min Operating Temperature=-65°C, Part number=1N5817WS, Peak Reverse Current=1mA, China RoHS=Non-Compliant, Country of Origin="Mainland China", Current Rating=1A, Diameter=2.7mm, Element Configuration=Single, Export Control Classification Number (ECCN) Code=EAR99, Forward Current=1A, Halogen Free="Halogen Free", Harmonized Tariff Schedule (HTS) Code=8541.10.00.80, Height=2.7mm, Introduction Date=1997-05-06, Lead Free="Lead Free", Length=5.1816mm, Lifecycle Status=Production, Max Output Current=1A, Max Repetitive Reverse Voltage (Vrrm)=20V, Max Reverse Voltage (DC)=20V, Mount=SMD, Number of Elements=1, Number of Terminals=2, Output Current=1A, Packaging=Bulk, Peak Non-Repetitive Surge Current=25A, Pins=2, Polarity=Standard, Radiation Hardening=No, REACH SVHC=No, Reverse Standoff Voltage=20V, RoHS=Compliant, Schedule B="8541100080, 8541100080", Voltage Rating (DC)=20V, Weight=4.535924g, Width=2.7mm
D2 D3 D4 D5: library part CMP-ROOT-00025-2, "Generic red 0603 LED", Case/Package=0603, Manufacturer=Any, Part number="Any Red 0603 LED", Color=Red, Mount=SMD, RoHS=Yes
J1: library part CMP-ROOT-01262-4, "Power Connector", Case/Package=Non-standard, Color=Yellow, Manufacturer=AMASS, Contact Material=Brass, Mount=SMD, Orientation=Straight, Part number=XT30U-F, Pins=2, RoHS=Yes
J2: library part CMP-001-1800-1, "USB Connector, 16 Contact(s), Female, Right Angle, Solder Terminal, Locking, Receptacle", Current Rating=4.25A, Flammability Rating="UL94 V-0", Insulation Color=Black, Manufacturer=GCT, Max Operating Temperature=85°C, Min Operating Temperature=-40°C, Part number=USB4800-03-A, Voltage Rating=20V, Connector Type=USB, Contact Material="Copper Alloy", Contact Plating=Gold, Gender=Receptacle, Height=3.66mm, Mating Cycles=10000, Mount=TH, Mounting Technology="Through Hole,Horizontal", Number of Contacts=16, Number of Ports=1, Number of Positions=16, Orientation="Right Angle", Packaging="Tape and Reel", Pins=16, RoHS=Yes, Series=USB4085, Shielding=Shielded, Standoff Height=3.5mm, Termination=Solder, USB PD=3.2, USB Standard="USB 2.0"
J3 J4: library part CMP-ROOT-01318-3, "Conn Shrouded Header (2 Sides) HDR 6 POS 2mm Solder ST Top Entry Thru-Hole Milli-Grid Tube", Current Rating=2A, Dielectric Material=Polyamide, Insulation Resistance=1GΩ, Manufacturer=Molex, Manufacturer Lifecycle Status=ACTIVE, Max Operating Temperature=105°C, Min Operating Temperature=-55°C, Operating Force=1.9N, China RoHS=Compliant, Contact Gender=Male, Contact Plating=Gold, Export Control Classification Number (ECCN) Code=EAR99, Harmonized Tariff Schedule (HTS) Code=8536.69.40.40, Introduction Date=2014-01-28, Lifecycle Status=Production, Mount=TH, Number of Circuits=6, Number of Rows=2, Orientation=Vertical, Part number=0878310641, Pins=6, Plating=Tin, Plating Thickness=762nm, REACH SVHC=Yes, RoHS=Compliant, Row Spacing=2mm, Schedule B="8536694040, 8536694040", Terminal Pitch=2mm
J5 J6 J7: library part CMP-ROOT-01311-2, "Conn FFC Connector F 6 POS 1.27mm Solder ST Thru-Hole Automotive Box/Carton", Color=Red, Contact Current Rating=1A, Contact Resistance=10mΩ, Insulation Resistance=1GΩ, Manufacturer="TE Connectivity", Manufacturer Lifecycle Status=ACTIVE, Max Operating Temperature=105°C, Min Operating Temperature=-40°C, Operating Force=4.8928N, Operating Supply Voltage=100V, China RoHS=Compliant, Contact Gender=Female, Contact Material="Nickel, Tin", Contact Plating=Tin, Current Rating=1A, Height=4.2mm, Housing Color=Red, Insulation Material=Thermoplastic, Lead Free="Lead Free", Lead Pitch=1.27mm, Length=9.7mm, Lifecycle Status=Production, Mating Connector Lock=Without, Mount=TH, Mounting Technology="Through Hole", Number of Contacts=6, Number of Ports=1, Number of Positions=6, Number of Rows=2, Orientation=Vertical, Packaging=Box, Part number=7-215079-6, PCB Mount Retention=With, Pins=6, Plating Thickness=4.99999µm, REACH SVHC=Yes, RoHS=Compliant, Row Spacing=2.54mm, Shielding=No, Terminal Pitch=1.27mm, Voltage Rating=100V, Voltage Rating (DC)=100V
L1: library part CMP-ROOT-01341-1, "Power Inductor, 4.7Uh, 3.85A, Shielded Rohs Compliant: Yes", Ambient Temperature Range High=110°C, Ambient Temperature Range Low=-55°C, Case/Package="3.5 mm x 3.2 mm", DC Resistance (DCR)=63.2mΩ, Manufacturer="Wurth Elektronik", Manufacturer Lifecycle Status=NEW, Max Operating Temperature=150°C, Saturation Current=3.2A, Height=2mm, Length=3.5mm, Lifecycle Status=New, Min Operating Temperature=-55°C, Mount=SMD, Mounting Technology="Surface Mount", Part number=74479335329247, RoHS=Compliant, Width=3.2mm, YEOL="1 = Estimated lifetime > 10 years"
LS1: library part CMP-ROOT-01315-3, "7mm", Case/Package=Nonstandard, Manufacturer=Unknown, Mount=TH, Part number=Unknown, Pins=2, RoHS=Yes
P1: library part CMP-002-000004-1, "4 POS 2.54mm Vertical THT Header", Manufacturer="Adam Tech", Lead Free="Lead Free", Mount=TH, Number of Positions=4, Part number=PH1-04-UA, Pins=4, Pitch=2.54mm, RoHS=Yes, Termination="Through Hole"
P2: library part CMP-ROOT-01020-1, "Conn Unshrouded Header HDR 5 POS 2.54mm Solder ST Top Entry Thru-Hole Bag", Manufacturer=Wurth, Mount=TH, Part number=61300511121, RoHS=Yes
P3 P4: library part CMP-002-000004-1, "4 POS 2.54mm Vertical THT Header", Manufacturer="Adam Tech", Part number=PH1-04-UA, Lead Free="Lead Free", Mount=TH, Number of Positions=4, Pins=4, Pitch=2.54mm, RoHS=Yes, Termination="Through Hole"
P5 P6 P7 P8: library part CMP-ROOT-00217-1, "Connector Header Through Hole 3 position 0.100\" (2.54mm)", Case/Package=SIL, Color=Black, Contact Resistance=25mR, Current Rating=3A, Insulation Resistance=10GR, Manufacturer="Harwin Inc.", Max Operating Temperature=105°C, Min Operating Temperature=-40°C, Package Quantity=1000, Voltage Rating (AC)=750V, Connector Type="Male Pin", Contact Material=Brass,Bronze, Contact Mating Length=0.24inch, Contact Plating=Gold, Depth=2.54mm, Height=0.125inch, Housing Color=Black, Housing Material=Nylon, Length=7.62mm, Max Current Rating=3A, Mount="Through Hole", Number of Contacts=3, Number of Positions=3, Number of Rows=1, Orientation=Straight, Packaging=Bulk, Part number=M20-9990345, Pins=3, Pitch=2.54mm, Radiation Hardening=No, REACH SVHC="No SVHC", RoHS=Yes, Termination=Solder, Weight=0.006138oz, Width=0.25inch
P9: library part CMP-002-000007-1, "Conn Unshrouded Header HDR 2 POS 2.54mm Solder ST Top Entry Thru-Hole Bag", Contact Resistance=20mΩ, Current Rating=3A, Insulation Resistance=5GΩ, Manufacturer="Adam Tech", Part number=PH1-04-UA, Voltage Rating=250V, Contact Gender=Male, Contact Material=Brass, Contact Plating=Gold, Height=9.2456mm, Housing Material=PBT, Lead Free="Lead Free", Lifecycle Status=Production, Mount=TH, Number of Contacts=2, Number of Positions=2, Number of Rows=1, Pins=2, Pitch=2.54mm, REACH SVHC=Yes, RoHS=Compliant, Schedule B="8536694040, 8536694040", Terminal Pitch=2.54mm, Termination=Solder
Q1 Q4: library part CMP-ROOT-01317-1, "Trans MOSFET P-CH 30V 15A 8-Pin PowerPAK EP T/R", Case/Package="PowerPAK® 1212-8", Continuous Drain Current (ID)=50A, Drain to Source Breakdown Voltage=-30V, Drain to Source Resistance=10.6mΩ, Drain to Source Voltage (Vdss)=30V, Gate to Source Voltage (Vgs)=25V, Input Capacitance=1.93nF, Manufacturer="Vishay Siliconix", Max Operating Temperature=150°C, Max Power Dissipation=52W, Min Operating Temperature=-55°C, Element Configuration=Single, Export Control Classification Number (ECCN) Code=EAR99, Fall Time=12ns, Introduction Date=2013-06-25, Lifecycle Status=Production, Min Breakdown Voltage=30V, Mount=SMD, Mounting Technology="Surface Mount", Number of Channels=1, Number of Elements=1, Number of Terminals=5, Part number=SIS427EDN-T1-GE3, Pins=8, Radiation Hardening=No, Rds On Max=10.6mΩ, REACH SVHC=Unknown, Rise Time=40ns, RoHS=Compliant, Schedule B=8541290080, Turn-Off Delay Time=28ns, Turn-On Delay Time=45ns
Q2 Q3 Q5: library part CMP-ROOT-01328-1, "Small Signal Bipolar Transistor, 0.1A I(C), 30V V(BR)CEO, 1-Element, NPN, Silicon, TO-236AB", Case/Package=SOT-23, Collector Base Voltage (VCBO)=30V, Collector Emitter Saturation Voltage=600mV, Emitter Base Voltage (VEBO)=5V, Frequency=100MHz, Manufacturer=Nexperia, Manufacturer Lifecycle Status="RELEASED FOR SUPPLY", Max Collector Current=100mA, Max Operating Temperature=150°C, Max Power Dissipation=250mW, Min Operating Temperature=-65°C, China RoHS=Compliant, Collector Emitter Breakdown Voltage=30V, Collector Emitter Voltage (VCEO)=30V, Contact Plating=Tin, Element Configuration=Single, Gain Bandwidth Product=100MHz, hFE Min=200, Lifecycle Status=Production, Mount=SMD, Mounting Technology="Surface Mount", Number of Elements=1, Number of Terminals=3, Part number=BC848B,235, Pins=3, Polarity=NPN, Power Dissipation=250mW, Radiation Hardening=No, REACH SVHC=Yes, RoHS=Compliant, Transition Frequency=100MHz
R1: library part CMP-0001-00268-2, "Resistor, 0603, 53.6k, 1%, 1/10W", Case/Package=0603, Manufacturer=Any, Tolerance=1%, Mount=SMD, Part number="Resistor, 0603, 53.6k, 1%, 1/10W", RoHS=Yes
R2 R6 R9: library part CMP-001-0125-2, "Resistor, 0603, 100k, 1%, 1/10W", Case/Package=0603, Manufacturer=Any, Power=100mW, Tolerance=1%, Mount=SMD, Part number="Resistor, 0603, 100k, 1%, 1/10W", RoHS=Yes
R3 R7 R30 R34 R38: library part CMP-001-0101-2, "Resistor, 0603, 10k, 1%, 1/10W", Case/Package=0603, Manufacturer=Any, Power=100mW, Tolerance=1%, Mount=SMD, Part number="Resistor, 0603, 10k, 1%, 1/10W", RoHS=Yes
R4 R5 R8 R10 R31 R35 R36 R37 R40: library part CMP-001-0054-5, "Resistor, 0603, 100R, 1%, 1/10W", Case/Package=0603, Manufacturer=Any, Power=100mW, Tolerance=1%, Mount=SMD, Part number="Resistor, 0603, 100R, 1%, 1/10W", RoHS=Yes
R11 R32 R33: library part CMP-001-0093-2, "Resistor, 0603, 4.7k, 1%, 1/10W", Case/Package=0603, Manufacturer=Any, Power=100mW, Tolerance=1%, Mount=SMD, Part number="Resistor, 0603, 4.7k, 1%, 1/10W", RoHS=Yes
R12: library part CMP-001-0081-2, "Resistor, 0603, 1.5k, 1%, 1/10W", Case/Package=0603, Manufacturer=Any, Power=100mW, Tolerance=1%, Mount=SMD, Part number="Resistor, 0603, 1.5k, 1%, 1/10W", RoHS=Yes
R13 R16 R23 R24 R25 R26 R27 R28 R29: library part CMP-001-0038-3, "Resistor, 0603, 22R, 1%, 1/10W", Case/Package=0603, Manufacturer=Any, Power=100mW, Tolerance=1%, Mount=SMD, Part number="Resistor, 0603, 22R, 1%, 1/10W", RoHS=Yes
R14 R15: library part CMP-001-0094-2, "Resistor, 0603, 5.1k, 1%, 1/10W", Case/Package=0603, Manufacturer=Any, Power=100mW, Tolerance=1%, Mount=SMD, Part number="Resistor, 0603, 5.1k, 1%, 1/10W", RoHS=Yes
R17: library part CMP-0001-00051-1, "Resistor, 1206, 1M, 1%, 1/4W", Case/Package=1206, Manufacturer=Any, Mount=SMD, Part number=Any, RoHS=Yes
R18: library part CMP-0001-00262-1, "Resistor, 0603, 100R, ≤5%, ≥1/16W", Case/Package=0603, Manufacturer=Any, Mount=SMD, Part number="Resistor, 0603, 100R, ≤5%, ≥1/16W", RoHS=Yes
R19 R21: library part CMP-001-0060-2, "Resistor, 0603, 200R, 1%, 1/10W", Case/Package=0603, Manufacturer=Any, Power=100mW, Tolerance=1%, Mount=SMD, Part number="Resistor, 0603, 200R, 1%, 1/10W", RoHS=Yes
R20: library part CMP-001-0074-3, "Resistor, 0603, 680R, 1%, 1/10W", Case/Package=0603, Manufacturer=Any, Power=100mW, Tolerance=1%, Mount=SMD, Part number="Resistor, 0603, 680R, 1%, 1/10W", RoHS=Yes
R22: library part CMP-001-0084-2, "Resistor, 0603, 2k, 1%, 1/10W", Case/Package=0603, Manufacturer=Any, Power=100mW, Tolerance=1%, Mount=SMD, Part number="Resistor, 0603, 2k, 1%, 1/10W", RoHS=Yes
R39: library part CMP-0001-00257-1, "Resistor, 0603, 10k, ≤5%, ≥1/16W", Case/Package=0603, Manufacturer=Any, Mount=SMD, Part number="Resistor, 0603, 10k, ≤5%, ≥1/16W", RoHS=Yes
S1: library part CMP-ROOT-00712-3, "Tactile Switches SWITCH TACTILE", Case/Package=-, Manufacturer=C&K, Part number="PTS815 SJM 250 SMTR LFS", Mount=SMD, RoHS=Yes
SW1 SW2: library part CMP-ROOT-01260-4, "Slide Switch, 1 Positions, Dpdt, Latched, 0.3A, 6Vdc, 6 Pcb Hole Cnt, Solder Terminal, Through", Case/Package=Non-standard, Color=Black, Contact Current Rating=300mA, Contact Resistance=70mΩ, Flammability Rating="UL94 V-0", Insulation Resistance=100MΩ, Manufacturer=C&K, Max Operating Temperature=85°C, Max Voltage Rating (DC)=6V, Min Operating Temperature=-40°C, Actuator Length=2.0066mm, Actuator Material=Nylon, Contact Plating=Silver, Current Rating=300mA, Depth=3.6mm, Electrical Life=5kcycles, Height=3.5mm, Housing Material=Nylon, Illumination Type=Non-Illuminated, Lead Free="Lead Free", Length=9mm, Life (Cycles)=5kcycles, Lifecycle Status=Production, Max Current Rating=300mA, Mount=SMD, Mounting Technology="Through Hole", Number of Positions=1, Orientation=Vertical, Packaging=Bulk, Part number=JS202011CQN, Pins=6, Radiation Hardening=No, REACH SVHC=Yes, RoHS=Compliant, Switch Function=On-On, Switch Travel=2mm, Terminal Material=Brass, Termination="PC Pins", Throw Configuration=DPDT, Voltage Rating (DC)=6V
SW3: library part CMP-ROOT-01342-2, "Switch DIP OFF ON SPST 4 Flat Slide 0.025A 24VDC PC Pins 2.54mm Thru-Hole Tube", Case/Package=Nonstandard, Color="Black, White", Contact Resistance=100mΩ, Insulation Resistance=100MΩ, Manufacturer="Same Sky", Max Current Rating=25mA, Max Operating Temperature=85°C, Max Voltage Rating (DC)=24V, Min Operating Temperature=-40°C, Actuating System=Flat, Contact Plating=Gold, Electrical Life=2kcycles, Export Control Classification Number (ECCN) Code=EAR99, Harmonized Tariff Schedule (HTS) Code=8536.50.70.00, Height=3.66mm, Introduction Date=2020-02-24, Length=11.16mm, Lifecycle Status=Production, Mount=THT, Mounting Technology="Through Hole", Number of Circuits=4, Number of Positions=2, Part number=DS04-254-2L-04BK, Pins=8, Pitch=2.54mm, REACH SVHC=Yes, RoHS=Compliant, Schedule B="8536509065, 8536509065", Switching Current=25mA, Switching Voltage=24V, Throw Configuration=SPST, Width=6.2mm
U1: library part CMP-00034-1, "4.3-V to 17-V input, 2-A synchronous buck converter in SOT563 6-SOT-5X3 -40 to 125", Case/Package=SOT-563-6, Manufacturer="Texas Instruments", Manufacturer Lifecycle Status=ACTIVE, Max Junction Temperature (Tj)=125°C, Max Supply Voltage=17V, Min Operating Temperature=-40°C, Min Supply Voltage=4.3V, Nominal Supply Current=590µA, Output Current=2A, Switching Frequency=580kHz, Height=600µm, Length=1.6mm, Lifecycle Status=Production, Max Operating Temperature=125°C, Mount=SMD, Number of Channels=1, Number of Outputs=1, Part number=TPS562207DRLR, Pins=6, RoHS=Compliant, Thickness=550µm, Topology=Buck, Width=1.2mm
U2: library part CMP-00026-2, "LDO Regulator, 300 mA, Low Iq, High PSRR, High Accuracy 3.3V, TSOP5, Active Discharge, Normal Vout Slew-Rate", Case/Package=TSOP-5, Dropout Voltage=235mV, Manufacturer=onsemi, Manufacturer Lifecycle Status=ACTIVE, Max Junction Temperature (Tj)=85°C, Max Operating Temperature=150°C, Max Supply Voltage=5.5V, Min Input Voltage=3.8V, Min Supply Voltage=1.7V, Nominal Supply Current=50µA, Output Current=300mA, Output Voltage=3.3V, Voltage Tolerance=2%, Accuracy=1%, China RoHS=Compliant, Height=1.1mm, Height - Seated (Max)=1.1mm, Length=3mm, Lifecycle Status=Production, Mount=SMD, Number of Channels=1, Number of Circuits=1, Number of Outputs=1, Number of Terminals=5, Output Type=Fixed, Part number=NCP115ASN330T2G, REACH SVHC=Yes, RoHS=Compliant, Schedule B="8542390000, 8542390000", Terminal Pitch=950µm, Width=1.5mm
U3: library part CMP-00027-3, "USB to UART 3Mbps USB 2.0 SOP-8 Interface Controllers RoHS", Case/Package=SOP-8, Manufacturer=HOLTEK, Harmonized Tariff Schedule (HTS) Code=8542.31.00.30, Introduction Date=2019-03-26, Lifecycle Status=NRND, Mount=SMD, Part number=HT42B534-2, Pins=8, RoHS=Yes
U4: library part CMP-00012-3, "MCU 32-bit STM32F1 ARM Cortex M3 RISC 64KB Flash 2.5V/3.3V 48-Pin LQFP Tray", Case/Package=LQFP, Clock Frequency=16MHz, Frequency=72MHz, Manufacturer=STMicroelectronics, Manufacturer Package Identifier=ai14911d, Max Operating Temperature=85°C, Max Power Dissipation=363mW, Max Supply Current=50mA, Max Supply Voltage=3.6V, Min Operating Temperature=-40°C, Min Supply Voltage=2V, Nominal Supply Current=1.7µA, Operating Supply Voltage=3.3V, ADC Channels (Resolution)="10-Ch 12-Bit", Address Bus Width=32b, China RoHS=Compliant, Core Architecture=ARM, Data Bus Width=32b, Density=512kb, EEPROM Memory Size=0B, Flash Memory Size=64kB, Height=1.45mm, Height - Seated (Max)=1.6mm, Interface="CAN, USB", Lead Free="Lead Free", Length=7mm, Lifecycle Status=Production, Memory Format=FLASH, Memory Size=64kB, Mount=SMD, Mounting Technology="Surface Mount", Number of A/D Converters=2, Number of ADC Channels=10, Number of Bits=32, Number of Channels=10, Number of I2C Channels=2, Number of I/Os=37, Number of Interrupts=16, Number of Programmable I/O=48, Number of PWM Channels=1, Number of SPI Channels=2, Number of Terminals=48, Number of Timers/Counters=4, Number of USART Channels=3, Oscillator Type=Internal, Part number=STM32F103C8T6, Peripherals=POR, Pins=48, Radiation Hardening=No, RAM Size=20kB, REACH SVHC=Yes, RoHS=Compliant, Schedule B=8542310000, Terminal Pitch=500µm, Termination=SMD/SMT, Watchdog Timer=Yes, Width=7mm
U5 U6: library part CMP-00022-3, "DC Mtr Drive, Brush, 150DEGC, TSSOPEP-14 Rohs Compliant: Yes", Case/Package=14-TSSOP, Current - Output=9.2A, Manufacturer="Infineon Technologies", Operating Temperature="-40C ~ 150C", Voltage - Load="4.5V ~ 40V", Interface=SPI, Motor Type - AC, DC="Brushed DC", Mount=SMD, Output configuration="Full bridge", Part number=BTM9011EPXUMA1, REACH SVHC=Yes, RoHS=Compliant, Voltage - Supply="4.5V ~ 40V"
Xtal1: library part CMP-ROOT-01254-3, "Crystal 16MHz ±10ppm (Tol) ±15ppm (Stability) 12pF FUND 150Ohm 4-Pin Ultra Mini-CSMD T/R", Case/Package="4-SMD, No Lead", ESR (Equivalent Series Resistance)=150Ω, Frequency=16MHz, Frequency Stability=15ppm, Frequency Tolerance=0.001%, Load Capacitance=12pF, Manufacturer="Abracon LLC", Max Operating Temperature=85°C, Min Operating Temperature=-30°C, China RoHS=Compliant, ESR=150Ω, Height=590µm, Length=2mm, Lifecycle Status=Production, Mount=SMD, Mounting Technology="Surface Mount", REACH SVHC=Yes, RoHS=Compliant, Schedule B=8541600080, Tolerance=0.001%, Width=1.6mm

## Free pads (board coordinates)
  round 0 hole 3.2 unplated: 0(106.75,85.25) 1(56.75,65.75) 1(121.75,65.75)

## Via types
v1: diameter 0.5, hole 0.3, Outer Top Layer to Outer Bottom Layer, 367 vias

## Nets (pads, with @x,y where several pads share a name; then routed paths per layer and width w, separated by ;. In a path a pad name is that pad's centre, name@x,y a point inside that pad or via, vN(x,y) a via of type N, cw(c..) or ccw(c..) an arc to the next point about the centre after c; other vN are vias at no path point)
+3V3: C3.2 C10.1 C17.1 C18.1 C19.2 C22.1 C28.1 C29.1 C30.1 D1.2 D2.2 J5.1 J6.1 J7.1 P2.4 R12.2 R18.2 R22.2 R30.2 R32.2 R33.2 R34.1 SW3.6 U2.5 U3.3 U4.1 U4.9 U4.24 U4.36 U4.48 | length 48.8
  Outer Top Layer w0.2: R12.2@81.7,91.4 81.994,91.106 v1(82.425,91.106) ; C28.1@88.75,100.95 88.91,100.79 J5.1@91.25,100.79 J5.1@91.26,100.8 ; v1(89.2,85.8) C17.1@90.25,85.8 90.45,86 91.05,86 91.3,86.25 U4.36@91.75,86.25 ; R22.2@93,67.95 v1(93,68.6) ; C29.1@95.6,100.8 95.61,100.81 J6.1@97.71,100.81 J6.1@97.7,100.8 ; U4.9@95.75,77.75 95.8,77.7 95.8,76.9 96.25,76.45 96.25,75.95 v1(96.3,75.9) 96.357,75.843 96.357,75.543 97.05,74.85 R30.2@97.25,74.85 ; J7.1@104.21,100.81 108.39,100.81 108.6,100.6 C30.1@108.8,100.6 ; C30.1@108.8,100.7 109,100.7 111.25,98.45 P2.4@111.25,98.37
  Outer Top Layer w0.3: U3.3@86.95,88.385 85.315,88.385 85,88.7 v1(85,90.2) 85.8,91 87.3,91 D1.2@88.3,92 ; U4.24@98.75,84.75 98.75,85.95 C18.1@98.8,86 v1(98.8,87.2) 99.777,87.2 99.827,87.25 100.75,87.25 101.25,86.75 101.25,85.1 D2.2@101.75,84.6 ; v1(99.9,89.8) 100.4,90.3 R18.2@101.45,90.3 ; R32.2@102.8,79.5 R33.2@102.8,81.2 ; v1(104.9,88.8) 106.35,90.25 R34.1@107.3,90.25
  Outer Bottom Layer w0.2: J5.1@91.25,100.79 91.26,100.8 97.7,100.8 J6.1@97.71,100.81
  other v1: 91,76.9 91,77.6 102.5,82.3 76.5,85.9 76.5,86.7 76.2,87.4